# Altium PCB MODULE_ESP8266_PCB_V1I1.PcbDoc
Units mil, origin at the board's own origin, x right, y up, seen from the top; angles counter-clockwise.
Board outline 1600 x 2700 mil, 2 copper layers (Top Layer, Bottom Layer); 30 components, 30 nets, 160 pads, 21 vias.
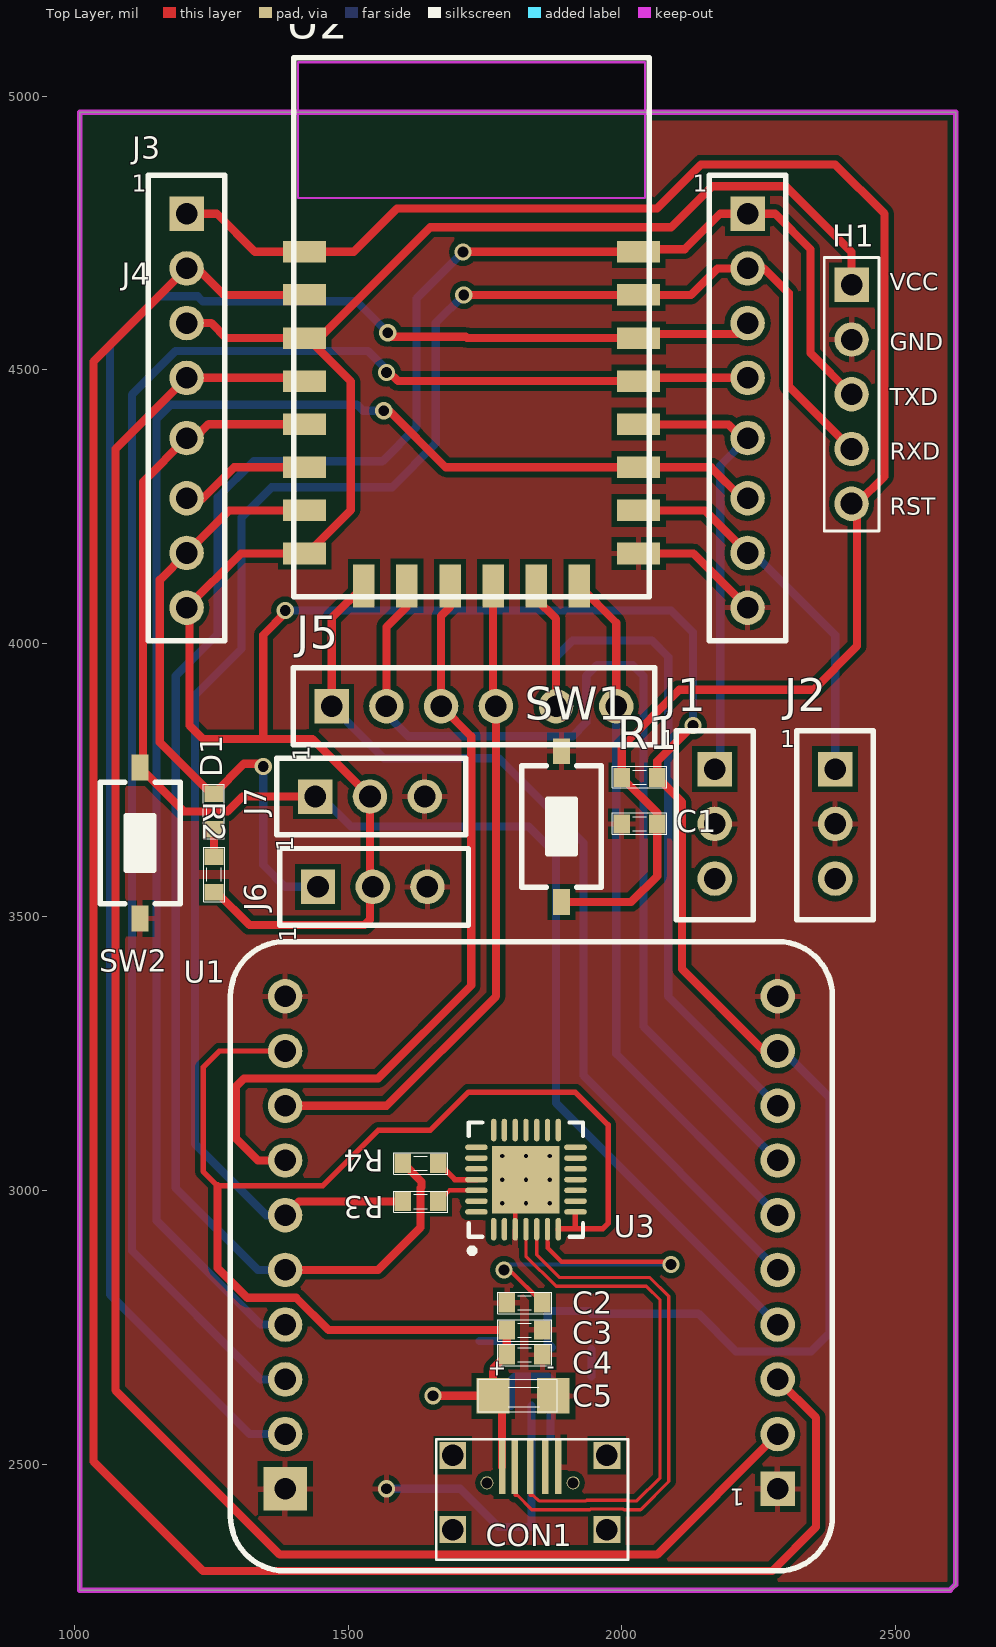
[diagram p0: Top Layer view]
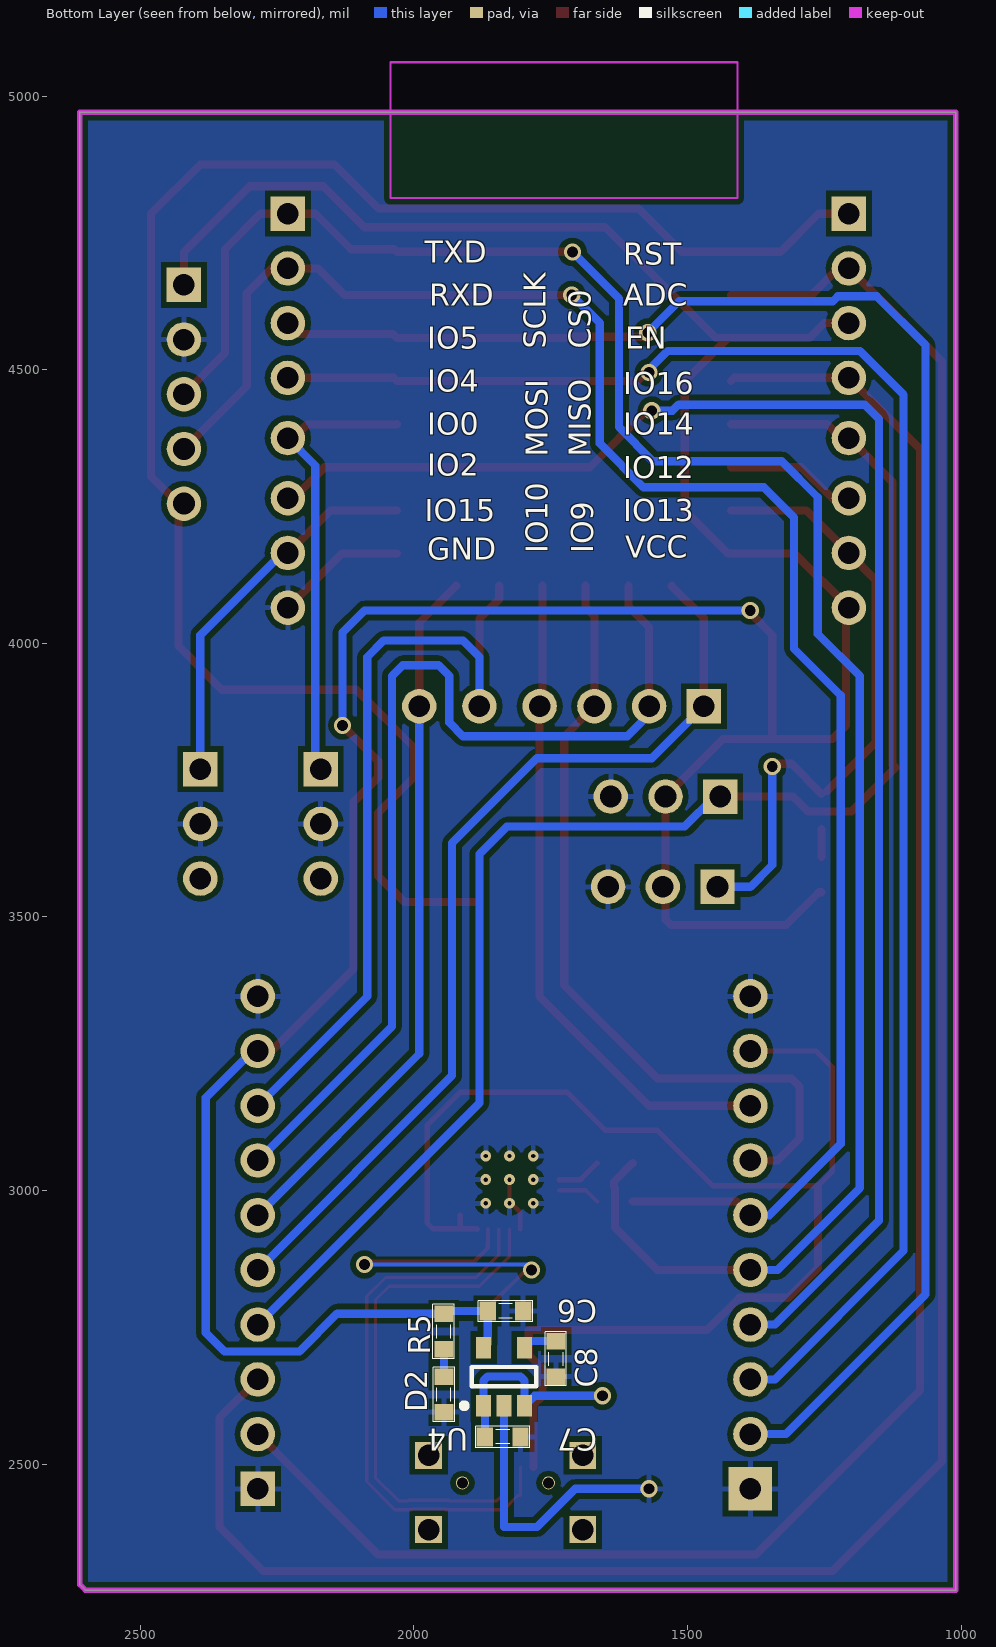
[diagram p1: Bottom Layer view, seen from below]
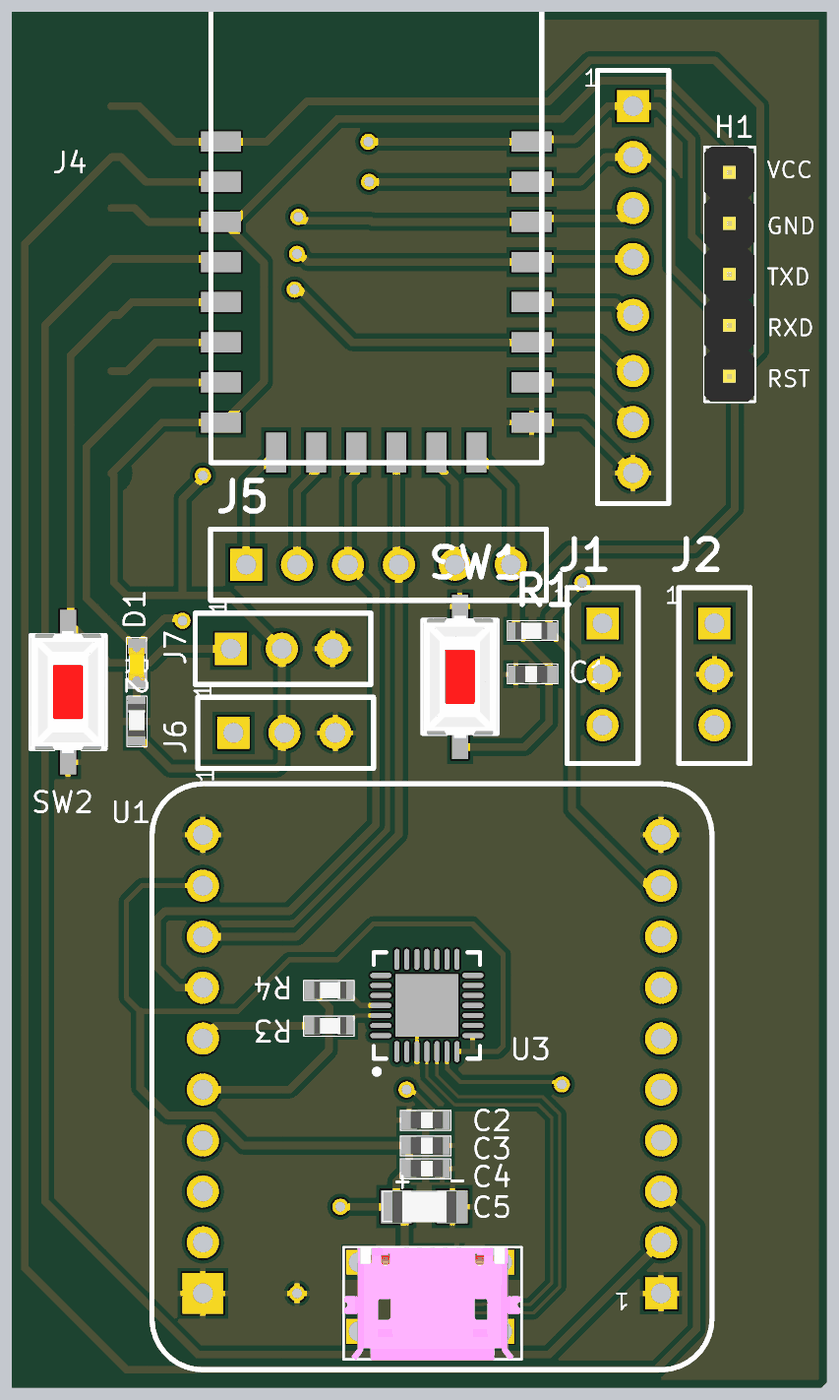
[diagram p2: 3D render of the assembled board from above, using the file's embedded part models]
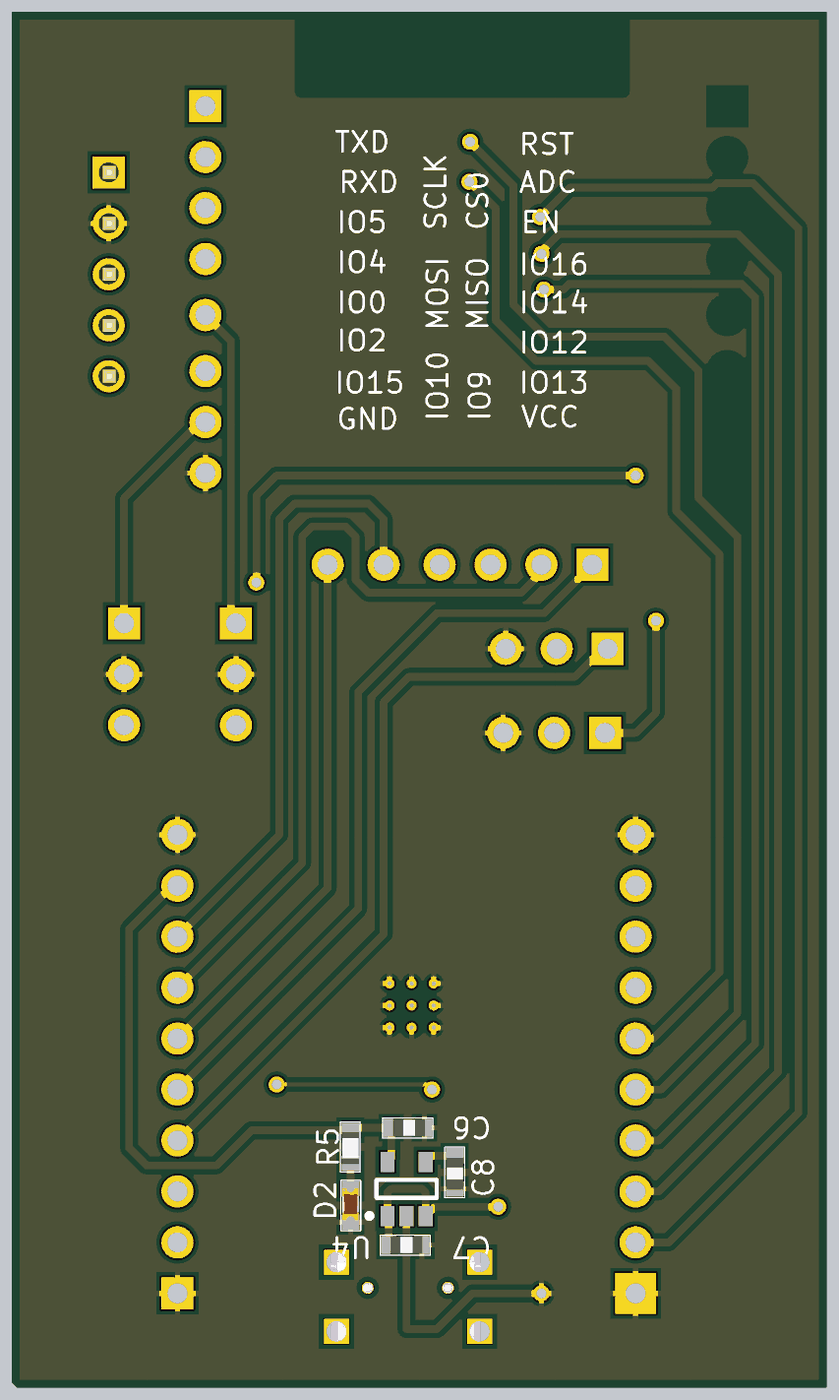
[diagram p3: 3D render of the assembled board from below, using the file's embedded part models]

## Layer stack, top to bottom
Top Solder: solder mask 0.4, Solder Resist, Dk 3.5
Top Layer: signal copper 1.4
Dielectric1: dielectric 12.6, FR-4, Dk 4.8
Bottom Layer: signal copper 1.4
Bottom Solder: solder mask 0.4, Solder Resist, Dk 3.5

## Board outline
1010,2270 1010,4970 2610,4970 2610,2280 2600,2270

## Design rules (kind name [scope] priority, off if disabled: settings)
Clearance [All] p1: gap=10
DiffPairsRouting [All] p1: maxlimit=15 minlimit=10 mostfreqgap=10 toplayer_minwidth=6 toplayer_maxwidth=15 toplayer_prefwidth=6 bottomlayer_maxgap=10 bottomlayer_minwidth=6 bottomlayer_maxwidth=15 bottomlayer_prefwidth=6 maxuncoupledlength=500
PolygonConnect [All] p1: connectstyle=Relief reliefconductorwidth=10 reliefentries=4 polygonreliefangle="90 Angle" airgapwidth=10
RoutingCorners [All] p1: cornerstyle=45-Degree minsetback=50 maxsetback=50
RoutingVias [All] p1: holewidth=19.68 width=31.5 viastyle="Through Hole" minholewidth=19.68 minwidth=31.5 maxholewidth=19.68 maxwidth=31.5
SilkToSolderMaskClearance SilkscreenOverComponentPads [IsPad] p1: minsilkscreentomaskgap=10 clearancetoexposedcopper=TRUE
SolderMaskExpansion [All] p1: expansion=4
Width [All] p1: maxlimit=20 minlimit=8 preferedwidth=8 minimp=50.000000 maximp=50.000000 favimp=50.000000
27 further rules are at their usual default settings.

## Classes and differential pairs
net class DIFF90: USB_N USB_P
differential pair USB: +USB_P -USB_N

## Components (designator, comment, footprint, x,y, rotation, side; value= is the part's Value field where it differs from the comment)
C1 "C_0.1F_0603_CERAMIC_16V" CAP_SMD0603 2045,3670 r0 top
C2 "C_0.1F_0603_CERAMIC_16V" CAP_SMD0603 1810,2795 r180 top
C3 "C_2.2uF_0603_CERAMIC_16V" CAP_SMD0603 1810,2745 r180 top
C4 "C_0.1F_0603_CERAMIC_16V" CAP_SMD0603 1810,2700 r180 top
C5 "C_10uF_1206_TANTALUM_25V" CAP_SMD1206_TANTALUM 1810,2625 r0 top
C6 "C_1uF_0603_CERAMIC_16V" CAP_SMD0603 1845,2780 r0 bottom
C7 "C_1uF_0603_CERAMIC_16V" CAP_SMD0603 1850,2550 r0 bottom
C8 "C_0.1F_0603_CERAMIC_16V" CAP_SMD0603 1740,2705 r90 bottom
CON1 "CONNECT_MICRO_USB_SURFACE" CON_MICRO_USB_HOLE 1691.26,2380.43 r0 top
D1 "LED2_YELLOW_0603_2.1V" LED_YELLOW_SMD0603 1255,3705 r90 top
D2 "LED2_RED_0603_2V" LED_RED_SMD0603 1945,2615 r270 bottom
H1 "HEADER5_ESP8266" HEADER5_ESP8266_HOLE_2.54 2420,4655 r270 top
J1 "SHUNT_GPIO0" CON_HEADER3_HOLE_2.54 2170,3770 r0 top
J2 "SHUNT_GPIO15" CON_HEADER3_HOLE_2.54 2390,3770 r0 top
J3 "CON_HEADER8_MALE_HOLE2.54" CON_HEADER8_HOLE_2.54 160,4555 r0 top
J4 "CON_HEADER8_MALE_HOLE2.54" CON_HEADER8_HOLE_2.54 1185,4555 r0 top
J5 "EXTERN_PORT" CON_HEADER6_HOLE_2.54 1470,3885 r90 top locked
J6 "CON_HEADER3_MALE_HOLE2.54" CON_HEADER3_HOLE_2.54 1445,3555 r90 top
J7 "CON_HEADER3_MALE_HOLE2.54" CON_HEADER3_HOLE_2.54 1440,3720 r90 top
R1 "R_10K_SMD0603_1%_1/10W" RES_SMD0603 2045,3755 r0 top
R2 "R_1K2_SMD0603_1%_1/10W" RES_SMD0603 1255,3565 r270 top
R3 "R_1K2_SMD0603_1%_1/10W" RES_SMD0603 1620,2980 r180 top
R4 "R_1K2_SMD0603_1%_1/10W" RES_SMD0603 1620,3050 r180 top
R5 "R_10K_SMD0603_1%_1/10W" RES_SMD0603 1945,2755 r90 bottom
SW1 "SW2_RESET" SW2-SMD 1890,3665 r90 top
SW2 "SW2_DPST_SURFACE_5MM" SW2-SMD 1120,3635 r90 top
U1 "SHIELD_MIKRO_BUS" SHIELD_MIKRO_BUS 2285,2455 r180 top locked
U2 "MODULE_ESP8266" MODULE_ESP8266 1420.51,4715.24 r0 top locked
U3 "USB_CP2102-GMR" QFN_28PIN_USBC2102 1825,3020 r90 top
U4 "POWER_LDO_LD3985_3.3V_SOT-23-5" POWER_LDO_LDR3985-3.3 1835,2660 r90 bottom

## Footprints (in the part's own frame and the unit in brackets; to place one, negate y for a bottom-side part, rotate by r counter-clockwise, add the part's x,y. Pads: shape width x height; smd on the part's side, far side on the other; paste and mask are expansions set on the pad)
CAP_SMD0603 [mil] "Compoment SMD 60x30mil"
  rect 30x35 smd: 1(-45,0) 2(20,0)
  silkscreen extent -62,-19 37,20, body extent -46,-17 16,17, height 33
CAP_SMD1206_TANTALUM [mil] "Compoment SMD 80x50mil"
  rect 60x65 smd: 1(-45,0) 2(65,0)
  silkscreen extent -72,-29 72,30, body extent -53,-31 73,30, height 65
CON_HEADER3_HOLE_2.54 [mm] "HEADER, SINGLE, DISTANCE = 100mil"
  rect 1.6x1.6 hole 1: 1(0,0)
  round 1.6 hole 1: 2(0,-2.54) 3(0,-5.08)
  silkscreen extent -1.78,-6.98 1.78,1.78
CON_HEADER6_HOLE_2.54 [mm] "HEADER, SINGLE, DISTANCE = 100mil"
  rect 1.6x1.6 hole 1: 1(0,0)
  round 1.6 hole 1: 2(0,-2.54) 3(0,-5.08) 4(0,-7.62) 5(0,-10.414) 6(0,-13.208)
  silkscreen extent -1.78,-14.99 1.78,1.78
CON_HEADER8_HOLE_2.54 [mm] "HEADER, SINGLE, DISTANCE = 100mil"
  rect 1.6x1.6 hole 1: 1(26.543,5.842)
  round 1.6 hole 1: 2(26.543,3.302) 3(26.543,0.762) 4(26.543,-1.778) 5(26.543,-4.572) 6(26.543,-7.366) 7(26.543,-9.906) 8(26.543,-12.446)
  silkscreen extent 24.77,-13.97 28.32,7.62
CON_MICRO_USB_HOLE [mm]
  rect 0.3x2.5 smd mask+0.05: 1(2.286,2.91) 2(2.886,2.91) 3(3.586,2.91) 4(4.286,2.91) 5(4.886,2.91)
  rect 1.25x1.25 hole 1 mask+0.05: ""(0,0) ""(0,3.45) ""(7.15,0) ""(7.15,3.45)
  round 0.6 hole 0.5 mask+0.05: ""(1.586,2.17) ""(5.586,2.17)
  silkscreen extent -0.76,-1.4 8.13,4.19, body extent -0.72,-1.45 8.08,4.18, height 2.77
HEADER5_ESP8266_HOLE_2.54 [mm] "HEADER, SINGLE, DISTANCE = 100mil"
  rect 1.6x1.6 hole 1: 1(0,0)
  round 1.6 hole 1: 2(2.54,0) 3(5.08,0)
  round 1.6 hole 1.02: 4(7.62,0) 5(10.16,0)
  silkscreen extent -1.27,-1.27 11.43,1.27, body extent -1.27,-1.27 11.43,1.22, height 8.54
LED_RED_SMD0603 [mil] "Compoment SMD 60x30mil"
  rect 30x35 smd: 1(-45,0) 2(20,0)
  silkscreen extent -62,-19 37,20, body extent -46,-16 16,16, height 24
LED_YELLOW_SMD0603 [mil] "Compoment SMD 60x30mil"
  rect 30x35 smd: 1(-45,0) 2(20,0)
  silkscreen extent -62,-19 37,20, body extent -46,-16 17,16, height 24
MODULE_ESP8266 [mm]
  rect 2x1 smd: 1(0,0) 2(0,-2) 3(0,-4) 4(0,-6) 5(0,-8) 6(0,-10) 7(0,-12) 8(0,-14) 15(15.5,-14) 16(15.5,-12) 17(15.5,-10) 18(15.5,-8) 19(15.5,-6) 20(15.5,-4) 21(15.5,-2) 22(15.5,0)
  rect 1x2 smd: 9(2.75,-15.5) 10(4.75,-15.5) 11(6.75,-15.5) 12(8.75,-15.5) 13(10.75,-15.5) 14(12.75,-15.5)
  Keep-Out Layer lines w0.1: -0.3,2.5 -0.3,8.8 15.8,8.8 15.8,2.5 -0.3,2.5
  silkscreen extent -0.5,-16 16,9
POWER_LDO_LDR3985-3.3 [mm] "SOT23, 5-Leads, Body 2.90x2.80mm, Pitch 0.95mm, IPC Medium Density"
  rect 1x0.7 smd: 1(-1.35,0.95) 2(-1.35,0) 3(-1.35,-0.95) 4(1.35,-0.95) 5(1.35,0.95)
  silkscreen extent -1.47,-1.5 0.45,1.98, body extent -0.85,-1.5 0.85,1.5, height 0.9
QFN_28PIN_USBC2102 [mm] "QFN, 28-Leads, Body 5.00x5.00mm, Pitch 0.50mm, Thermal Pad 3.13x3.13mm, IPC Medium Density"
  oval 1.05x0.25 smd: 1(-2.3,1.5) 2(-2.3,1) 3(-2.3,0.5) 4(-2.3,0) 5(-2.3,-0.5) 6(-2.3,-1) 7(-2.3,-1.5) 15(2.3,-1.5) 16(2.3,-1) 17(2.3,-0.5) 18(2.3,0) 19(2.3,0.5) 20(2.3,1) 21(2.3,1.5)
  oval 0.25x1.05 smd: 8(-1.5,-2.3) 9(-1,-2.3) 10(-0.5,-2.3) 11(0,-2.3) 12(0.5,-2.3) 13(1,-2.3) 14(1.5,-2.3) 22(1.5,2.3) 23(1,2.3) 24(0.5,2.3) 25(0,2.3) 26(-0.5,2.3) 27(-1,2.3) 28(-1.5,2.3)
  rect 3.13x3.13 smd: 29(0,0)
  silkscreen extent -3.42,-2.65 2.65,2.65, body extent -2.5,-2.5 2.5,2.5, height 0.8
RES_SMD0603 [mil] "Compoment SMD 60x30mil"
  rect 30x35 smd: 1(-45,0) 2(20,0)
  silkscreen extent -62,-19 37,20, body extent -46,-17 17,17, height 19
SHIELD_MIKRO_BUS [mm] "HEADER, SINGLE, DISTANCE = 100mil"
  rect 1.6x1.6 hole 1: 1(0,0)
  round 1.6 hole 1: 2(0,-2.54) 3(0,-5.08) 4(0,-7.62) 5(0,-10.16) 6(0,-12.7) 7(0,-15.24) 8(0,-17.78) 9(0,-20.32) 10(0,-22.86) 11(22.86,-22.86) 12(22.86,-20.32) 13(22.86,-17.78) 14(22.86,-15.24) 15(22.86,-12.7) 16(22.86,-10.16) 17(22.86,-7.62) 18(22.86,-5.08) 19(22.86,-2.54)
  rect 2.032x2.032 hole 1: 20(22.86,0)
  silkscreen extent -2.54,-25.4 25.4,3.81
SW2-SMD [mm] "Switch SMD type"
  rect 1.2x0.8 smd: 1(-3.5,0) 2(3.5,0)
  silkscreen extent -2.82,-1.85 2.82,1.85, body extent -3.05,-1.85 3.05,1.85, height 2.5

## Part data
C1 C2 C4 C8: "CAP CER 0.1UF 16V X7R 0603"
C3: "CAP CER 2.2UF 16V X5R 0603"
C5: "CAP TANT 10UF 25V 10% 1206"
C6 C7: "CAP CER 1UF 16V X5R 0603"
CON1: "CONN RCPT STD MICRO USB TYPE B"
D1: "LED YELLOW CLEAR 0603 SMD"
D2: "LED RED CLEAR 0603 SMD"
H1: library part HEADER5_ESP8266_HOLE_2.54, "CONN HEADER 5 POS 2.54"
J1 J2: library part CON_HEADER3_MALE_HOLE2.54, "CON_HEADER10_HOLE2.54"
J3 J4 J6 J7: "CON_HEADER10_HOLE2.54"
J5: library part CON_HEADER6_MALE_HOLE2.54, "CON_HEADER10_HOLE2.54"
R1 R5: "RES SMD 10K OHM 1% 1/10W 0603"
R2 R3 R4: "RES SMD 1.2K OHM 1% 1/10W 0603"
SW1: library part SW2_DPST_SURFACE_5MM, "SWITCH TACTILE SPST-NO 0.05A 12V"
SW2: "SWITCH TACTILE SPST-NO 0.05A 12V"
U3: "IC USB-TO-UART BRIDGE 28VQFN"
U4: "IC REG LDO 3.3V 0.15A SOT23-5"

## Via types
v1: diameter 31.5, hole 19.68, Top Layer to Bottom Layer, 12 vias
v2: diameter 19.68, hole 7.87, Top Layer to Bottom Layer, 9 vias

## Nets (pads, with @x,y where several pads share a name; then routed paths per layer and width w, separated by ;. In a path a pad name is that pad's centre, name@x,y a point inside that pad or via, vN(x,y) a via of type N, cw(c..) or ccw(c..) an arc to the next point about the centre after c; other vN are vias at no path point)
5VCC_USB: C3.2 C4.2 C5.1 C7.2 CON1.1 U1.12 U3.7 U3.8 U4.1 U4.3 | length 2982.6
  Top Layer w10: U1.12 1265,3255 1235,3225 1235,3035 1261.5,3008.5 1453.5,3008.5 1555,3110 1650,3110 1720,3180 1915,3180 1975,3120 1975,2940 1965,2930 1915,2930 ; U3.7 1884.61,2930 1915,2930 ; 1915,2955 1915,2930
  Top Layer w15: 1261.5,3008.5 1261.5,2858.5 1316,2804 1405.29,2804 1464.29,2745 C3.2 C4.2 1765,2675 C5.1 ; v1(1655,2625) C5.1 ; CON1.1 1781.26,2608.74 C5.1
  Bottom Layer w15: v1(1655,2625) 1779.45,2625 U4.3 1797.6,2652.6 1805,2660 1865,2660 1872.4,2652.6 U4.1 1870,2604.45 C7.2
AIN1: J3.2 U1.3 U2.2 | length 4221
  Top Layer w15: U2.2 1273.5,4636.5 1225,4685 J3.2 1035,4515 1035,2505 1235,2305 2275,2305 2355,2385 2355,2585 U1.3
CS0: J5.1 U1.5 U2.9 | length 1734.9
  Top Layer w15: J5.1 1470,4046.22 U2.9
  Bottom Layer w15: J5.1 1565,3790 1775,3790 1930,3635 1930,3210 U1.5
GND_USB: C1.1 C2.2 C3.1 C4.1 C5.2 C6.1 C7.1 C8.1 CON1.5 D2.2 H1.2 J1.2 J2.2 J4.8 J6.3 J7.3 SW1.2 SW2.1 U1.1 U1.10 U1.11 U1.20 U2.15 U3.3 U3.29 U4.2 | length 854.8
  Top Layer w8: U3.3 1805.31,2960.31 1825,2980 v2(1825,3020)
  Top Layer w15: U2.15 2130.94,4164.06 J4.8
  Bottom Layer w15: v1(1570,2455) 1705,2455 1775,2385 1835,2385 U4.2
  other v2: 1781.69,2976.69 1825,2976.69 1868.31,2976.69 1781.69,3020 1868.31,3020 1781.69,3063.31 1825,3063.31 1868.31,3063.31
GPIO0: J1.1 J4.5 U2.18 | length 843.7
  Top Layer w15: U2.18 2031.02,4400 2195,4400 2225,4370 J4.5
  Bottom Layer w15: J1.1 2180,3780 2180,4325 J4.5
GPIO2: J4.6 U1.17 U2.17 | length 2940.3
  Top Layer w15: v1(1565,4425) 1575,4425 1678.46,4321.54 U2.17 2163.46,4321.54 2220,4265 J4.6
  Bottom Layer w15: U1.17 1340,2755 1150,2945 1150,4410 1176,4436 1516,4436 1527.01,4425 v1(1565,4425)
GPIO4: J4.4 U1.18 U2.19 | length 3127.8
  Top Layer w15: v1(1570,4495) 1575,4495 1590.98,4479.02 U2.19 2036.73,4485 J4.4
  Bottom Layer w15: U1.18 1340,2655 1105,2890 1105,4454.29 1184.71,4534 1536,4534 1570,4500 v1(1570,4495)
GPIO5: J4.3 U1.19 U2.20 | length 3405.4
  Top Layer w15: v1(1572.5,4567.5) 1580,4560 1715,4560 1717.24,4557.76 U2.20 2037.99,4565 2210,4565 J4.3
  Bottom Layer w15: U1.19 1320,2555 1065,2810 1065,4545 1154,4634 1225.29,4634 1234.29,4625 1515,4625 v1(1572.5,4567.5)
GPIO9: J5.3 U1.14 U2.11 | length 1467.7
  Top Layer w15: U1.14 1335,3055 1295,3095 1295,3190 1310,3205 1555,3205 1725,3375 1725,3830 J5.3 1670,4050 1686.26,4066.26 U2.11
GPIO10: J5.4 U1.13 U2.12 | length 1219.9
  Top Layer w15: U1.13 1570,3155 1770,3355 J5.4 1765,3890 U2.12
GPIO12: J3.6 U2.6 | length 238.9
  Top Layer w15: J3.6 1235,4265 1291.54,4321.54 U2.6
GPIO13: D1.2 J3.7 J6.1 U2.7 | length 1154.2
  Top Layer w15: D1.2@1245,3730 1156,3819 1156,4116 J3.7 1282.8,4242.8 U2.7 ; D1.2 1310,3780 1345,3780 v1(1345,3775)
  Bottom Layer w15: v1(1345,3775) 1345,3595 1385,3555 J6.1
GPIO14: J3.5 J7.1 SW2.2 U1.4 U2.5 | length 2739.3
  Top Layer w15: U2.5 1245.28,4400.28 1220,4375 J3.5 1125,4295 1125,3777.8 SW2.2 1200.3,3692.5 1279.75,3692.5 1307.25,3720 J7.1
  Bottom Layer w15: J7.1 1450,3720 1505,3665 1830,3665 1880,3615 1880,3160 U1.4
GPIO15: J2.1 J4.7 U2.16 | length 698.6
  Top Layer w15: U2.16 2152.2,4242.8 J4.7
  Bottom Layer w15: J4.7 2240,4165 2390,4015 J2.1
GPIO16: J3.4 U1.2 U2.4 | length 3547.2
  Top Layer w15: U2.4 1414.53,4485 J3.4 1075,4355 1075,2635 1375,2335 2065,2335 U1.2
MISO: J5.2 U1.7 U2.10 | length 1835.5
  Top Layer w15: J5.2 1570,4030 1607.52,4067.52 U2.10
  Bottom Layer w15: J5.2 1570,3870 1610,3830 1910,3830 1935,3855 1935,3940 1955,3960 2020,3960 2040,3940 2040,3300 U1.7
MOSI: J5.5 U1.8 U2.13 | length 1457.7
  Top Layer w15: U2.13 1843.74,4081.26 1880,4045 J5.5
  Bottom Layer w15: J5.5 1880,3975 1910,4005 2055,4005 2085,3975 2085,3355 U1.8
NetC2_1: C2.1 U3.6 | length 676.1
  Top Layer w8: v1(1785,2855) 1795,2855 C2.1 ; U3.6 1864.37,2905.63 1865,2905 1865,2895 1890,2870 2085,2870 v1(2090,2865)
  Bottom Layer w8: v1(1785,2855) 1795,2865 v1(2090,2865)
NetC8_2: C8.2 U4.4 | length 62.5
  Bottom Layer w15: C8.2 1785.75,2725 U4.4
NetD1_1: D1.1 R2.1 | length 50
  Top Layer w15: R2.1 D1.1
NetD2_1: D2.1 R5.1 | length 50
  Bottom Layer w15: D2.1 R5.1
NetR3_1: R3.1 U3.26 | length 77.9
  Top Layer w8: R3.1 1685.31,3000.31 U3.26
NetR4_1: R4.1 U3.25 | length 81.9
  Top Layer w10: R4.1 1695,3020 U3.25
RST: C1.2 H1.5 J3.1 R1.1 SW1.1 U2.1 | length 3191.4
  Top Layer w15: J3.1 1260,4785 1329.76,4715.24 U2.1 1510.24,4715.24 1589.19,4794.19 2064.19,4794.19 2145,4875 2390,4875 2480,4785 2480,4305 H1.5@2430,4255 ; SW1.1 2017.2,3527.2 2065,3575 C1.2 2065,3690 R1.1 2000,3810 2105,3915 2350,3915 2430,3995 H1.5@2430,4255 ; H1.5 H1.5@2430,4255
RXD: H1.4 J4.2 R3.2 U1.15 U2.21 | length 3293
  Top Layer w15: U1.15 1410,2980 R3.2 ; v1(1711.5,4636.5) U2.21 2126.5,4636.5 2175,4685 J4.2 2260,4685 2305,4640 2305,4470 H1.4
  Bottom Layer w15: U1.15 1350,2955 1220,3085 1220,3905 1305,3990 1305,4230 1360,4285 1580,4285 1660,4365 1660,4585 v1(1711.5,4636.5)
SCLK: J5.6 U1.6 U2.14 | length 1300.2
  Top Layer w15: U2.14 1990,4037.48 J5.6
  Bottom Layer w15: J5.6 1990,3250 U1.6
TXD: H1.3 J4.1 R4.2 U1.16 U2.22 | length 3725.9
  Top Layer w15: U1.16 1555,2855 1632.5,2932.5 1632.5,3004.75 1633.88,3006.12 1633.88,3016.12 R4.2 ; v1(1710,4715) 1710.24,4715.24 U2.22 2035.51,4720 2115,4720 2180,4785 J4.1 2280,4785 2345,4720 2345,4530 H1.3
  Bottom Layer w15: U1.16 1335,2855 1185,3005 1185,3940 1261.87,4016.87 1261.87,4266.87 1327.5,4332.5 1562.5,4332.5 1625,4395 1625,4630 v1(1710,4715)
USB_N: CON1.2 U3.5 | length 1024.2
  Top Layer w6: CON1.2 1804.88,2442.79 1809.81,2442.79 1835.81,2416.79 1941.51,2416.79 1942.76,2418.04 2002.75,2418.04 2004,2416.79 2034.41,2416.79 2086,2468.37 2086,2806.63 2051.63,2841 1886.63,2841 1844.68,2882.94 U3.5
USB_P: CON1.3 U3.4 | length 965
  Top Layer w6: U3.4 1825,2880 1880,2825 2045,2825 2070,2800 2070,2475 2027.79,2432.79 2010.63,2432.79 2009.37,2434.04 1936.14,2434.04 1934.89,2432.79 1848.71,2432.79 1838.71,2442.79 1832.44,2442.79 CON1.3
VCC: C6.2 H1.1 J3.3 J3.8 J6.2 J7.2 R1.2 R2.2 R5.2 U1.9 U2.3 U2.8 U4.5 | length 6419.6
  Top Layer w15: J3.3 1250,4585 1277.24,4557.76 U2.3 U2.3@1425.58,4557.76 ; R2.2 1260,3545 1320,3485 1530,3485 1540,3495 J6.2@1540,3560 ; v1(1385,4060) 1385,4055 1345,4015 1345,3825 ; J6.2 J6.2@1540,3560 ; v1(2130,3850) 2065,3785 R1.2 2110,3710 2110,3405 2260,3255 U1.9 ; H1.1 2420,4715 2300,4835 2165,4835 2090,4760 1650,4760 1447.76,4557.76 U2.3@1425.58,4557.76 ; 1345,3825 1435,3825 J7.2 J6.2@1540,3560 ; 1345,3825 1235,3825 1210,3850 1210,4060 J3.8 1304.06,4164.06 U2.8 1425.58,4164.06 1505,4243.48 1505,4478.33 U2.3@1425.58,4557.76
  Bottom Layer w15: v1(1385,4060) 2090,4060 2130,4020 v1(2130,3850) ; U4.5 1865,2720.55 C6.2 1940,2780 R5.2 2140,2775 2209,2706 2346,2706 2380,2740 2380,3170 2295,3255 U1.9
pads on no net: CON1. CON1.4 J1.3 J2.3 U3.1 U3.2 U3.9 U3.10 U3.11 U3.12 U3.13 U3.14 U3.15 U3.16 U3.17 U3.18 U3.19 U3.20 U3.21 U3.22 U3.23 U3.24 U3.27 U3.28

## Polygon pours and split planes (outlines as drawn)
GND_USB on Bottom Layer "Top Layer-No Net" (solid, remove dead copper, pour order 22): 1010,4970 2610,4970 2610,2270 1010,2270
GND_USB on Top Layer "Top Layer-No Net" (solid, remove dead copper, pour order 24): 1010,4595 1010,4970 2600,4970 2610,2680 2600,2270 2420,2270 1010,2270

## Keep-outs
Keep-Out Layer:
  lines w10: 1010,2270 2600,2270 2610,2280 2610,2765 2610,4970 1010,4970 1010,2270

## Text inside footprints (layer, text, board x,y; h text height)
C5: Top Overlay "-" at 1863,2664 h30; Top Overlay "+" at 1755,2662 h30
H1: Top Overlay "VCC" at 2490,4645 h31.5; Top Overlay "GND" at 2490,4535 h31.5; Top Overlay "TXD" at 2490,4435 h31.5; Top Overlay "RXD" at 2490,4335 h31.5; Top Overlay "RST" at 2490,4235 h31.5
J1: Top Overlay "1" at 2070,3810 h31.5
J2: Top Overlay "1" at 2290,3810 h31.5
J3: Top Overlay "1" at 1105,4825 h31.5
J4: Top Overlay "1" at 2130,4825 h31.5
J5: Top Overlay "1" at 1430,3785 h31.5 r90
J6: Top Overlay "1" at 1405,3455 h31.5 r90
J7: Top Overlay "1" at 1400,3620 h31.5 r90
U1: Top Overlay "1" at 2225,2455 h31.5 r180
U2: Bottom Overlay "MISO" at 1676.42,4341.22 h40 r270; Bottom Overlay "CS0" at 1676.42,4538.07 h40 r270; Bottom Overlay "IO9" at 1672.48,4164.06 h40 r270; Bottom Overlay "MOSI" at 1755.16,4341.22 h40 r270; Bottom Overlay "TXD" at 1979.57,4695.55 h40; Bottom Overlay "SCLK" at 1759.09,4538.07 h40 r270; Bottom Overlay "IO0" at 1975.63,4380.59 h40; Bottom Overlay "IO4" at 1975.63,4459.33 h40; Bottom Overlay "IO5" at 1975.63,4538.07 h40; Bottom Overlay "RXD" at 1971.69,4616.81 h40; Bottom Overlay "GND" at 1975.63,4152.24 h40; Bottom Overlay "IO15" at 1979.57,4223.11 h40; Bottom Overlay "IO2" at 1975.63,4305.79 h40; Bottom Overlay "IO10" at 1755.16,4164.06 h40 r270; Bottom Overlay "RST" at 1617.36,4691.61 h40; Bottom Overlay "IO14" at 1617.36,4380.59 h40; Bottom Overlay "IO16" at 1617.36,4455.39 h40; Bottom Overlay "EN" at 1613.43,4538.07 h40; Bottom Overlay "ADC" at 1617.36,4616.81 h40; Bottom Overlay "VCC" at 1613.43,4156.18 h40; Bottom Overlay "IO13" at 1617.36,4223.11 h40; Bottom Overlay "IO12" at 1617.36,4301.85 h40